# Altium PCB 继电器版本.PcbDoc
Units mil, origin at the board's own origin, x right, y up, seen from the top; angles counter-clockwise.
Board outline 8535.03 x 6310 mil, 2 copper layers (Top Layer, Bottom Layer); 9 components, 12 nets, 59 pads, 2 vias.
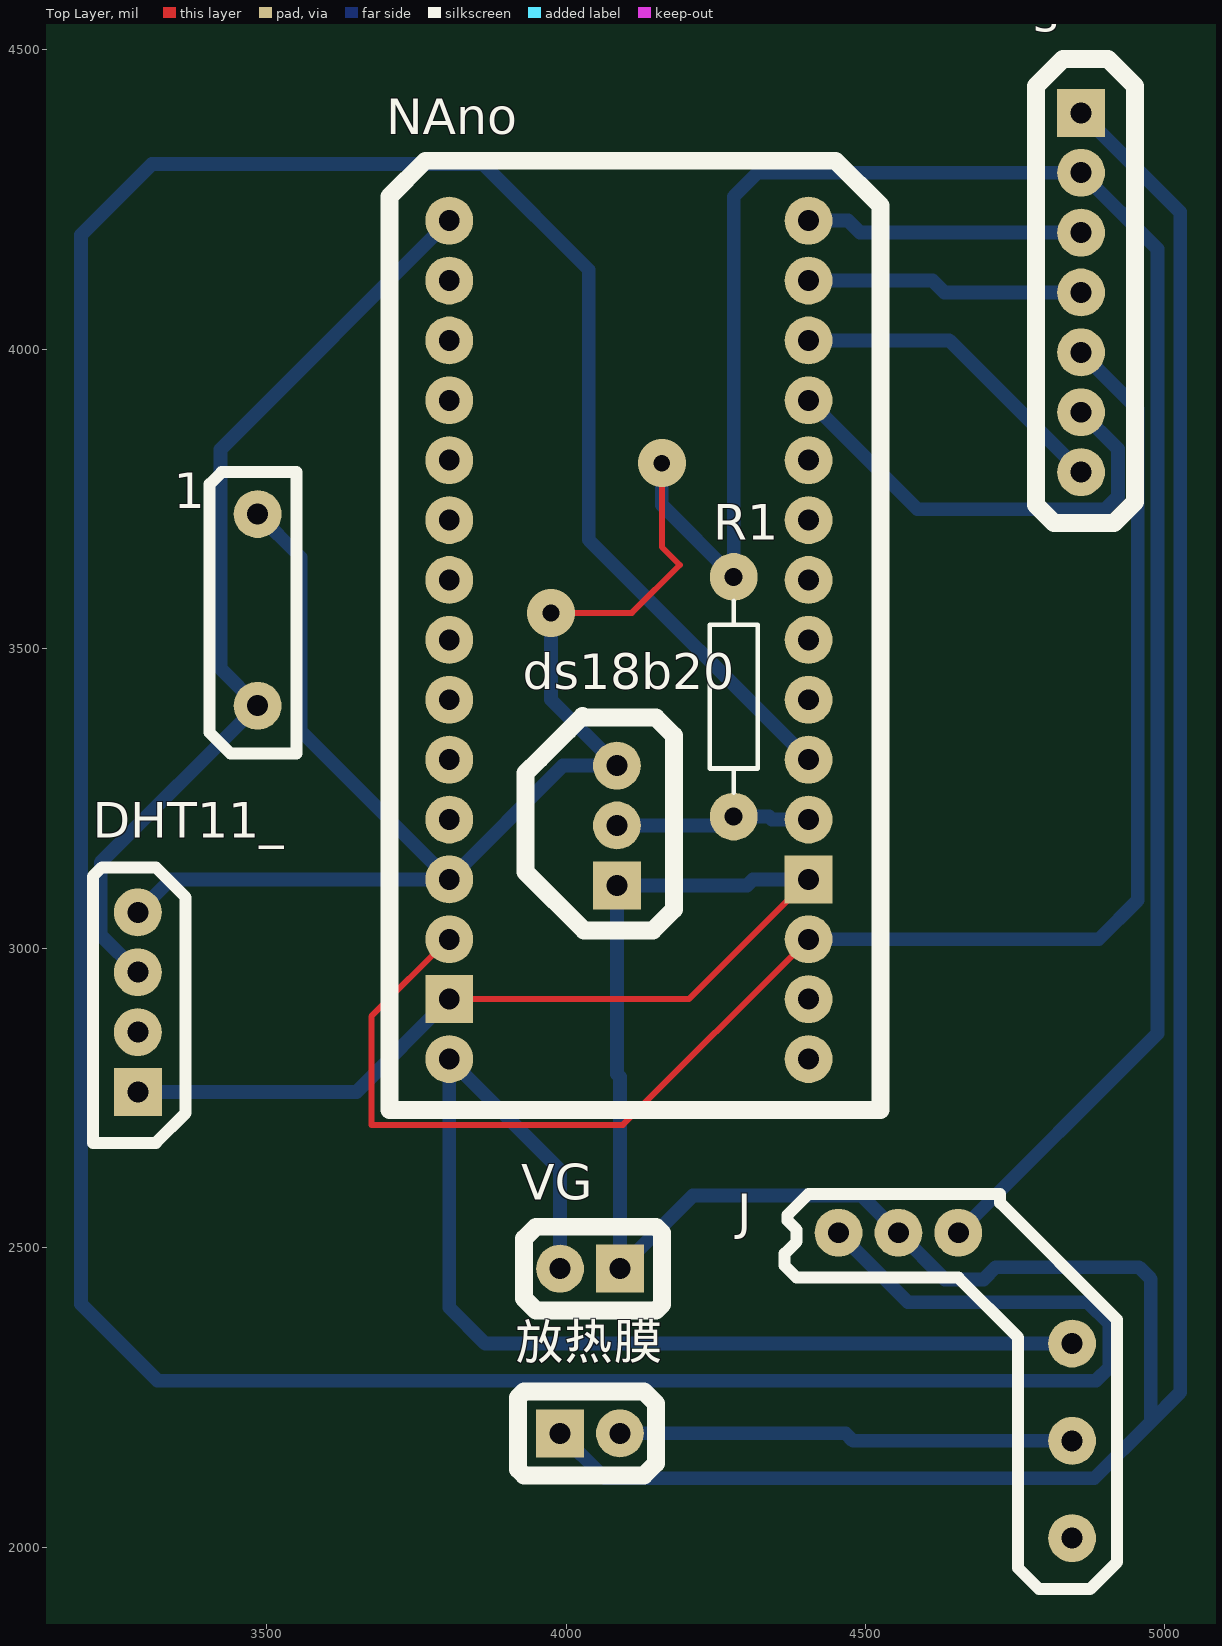
[diagram p0: Top Layer view]
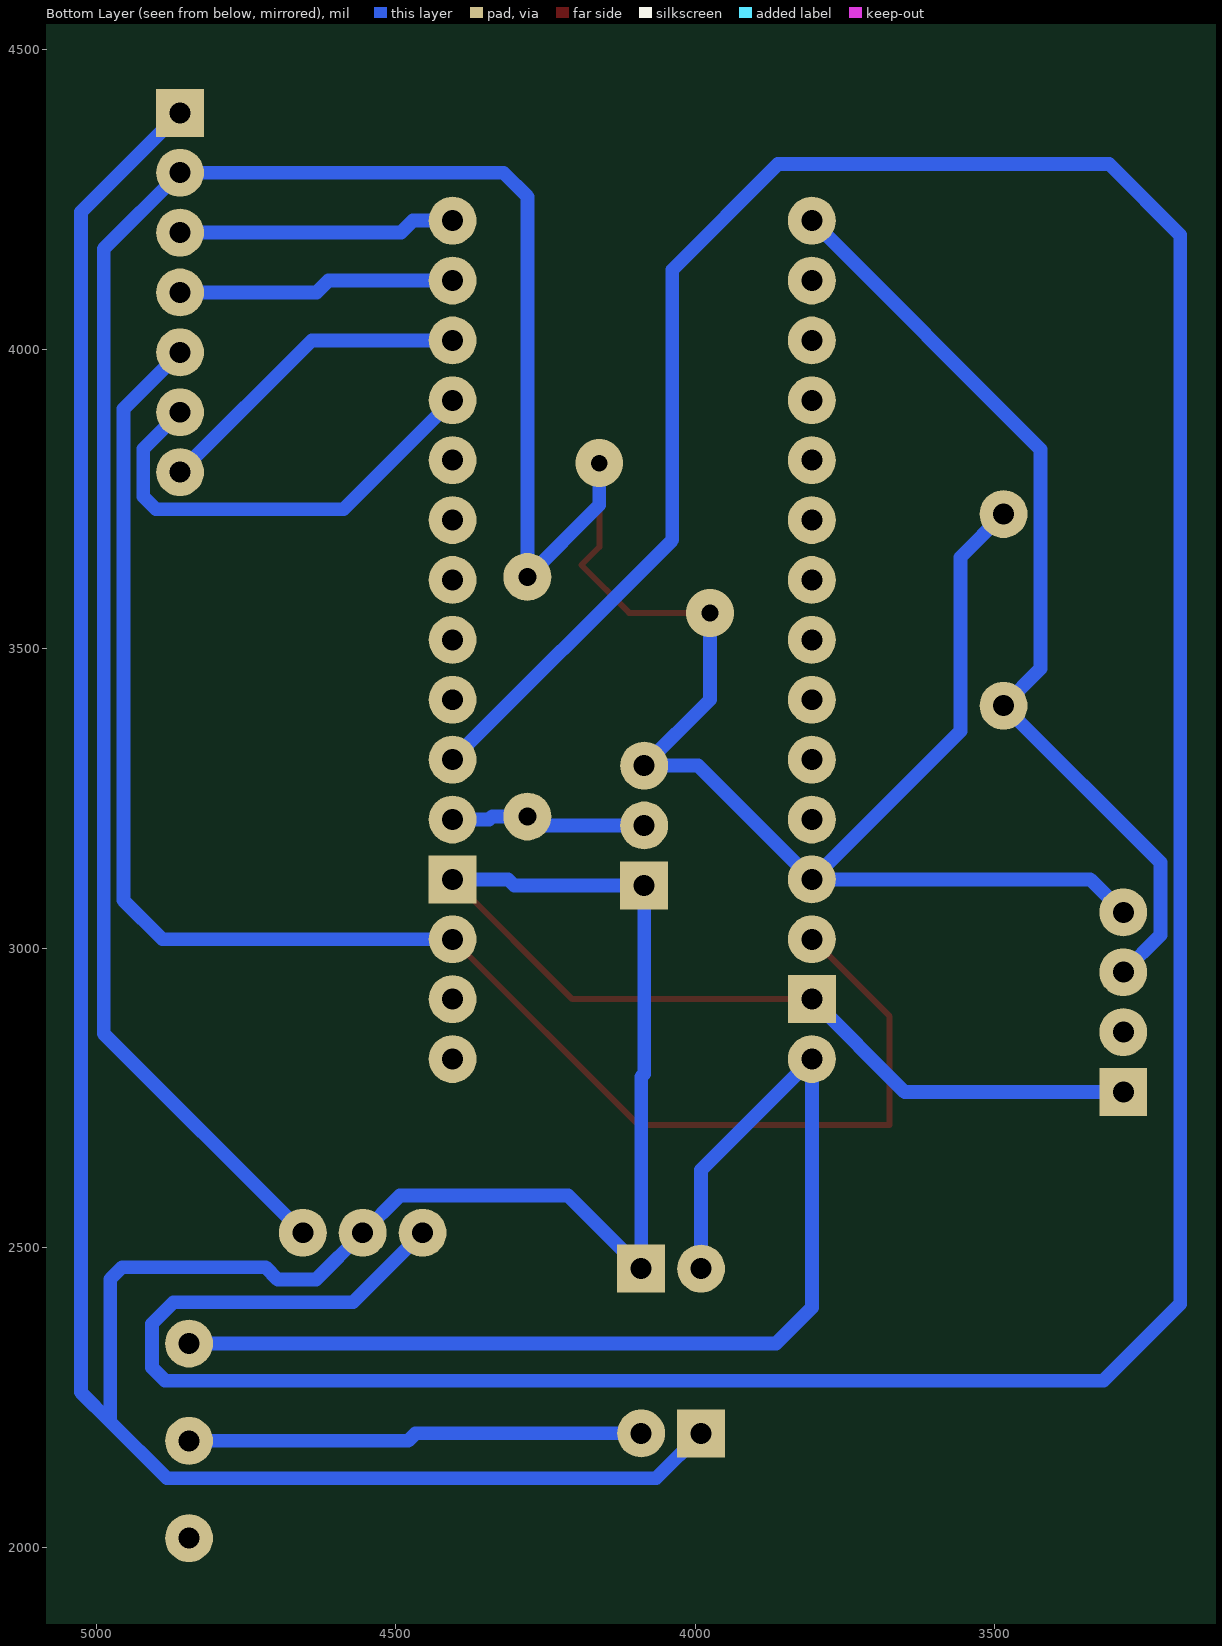
[diagram p1: Bottom Layer view, seen from below]

## Layer stack, top to bottom
Top Solder: solder mask 0.4, Solder Resist, Dk 3.5
Top Layer: signal copper 1.4
Dielectric 1: dielectric 12.6, FR-4, Dk 4.8
Bottom Layer: signal copper 1.4
Bottom Solder: solder mask 0.4, Solder Resist, Dk 3.5

## Board outline
-10.02,0 -10.02,6290 cw(c0,6290) 10.02,6290 10.02,6280.02 6940,6280.02 cw(c6940,6270) 6947.08,6277.08 8522.08,4702.08 cw(c8515,4695) 8525.01,4695 8525.01,900 cw(c8515,900) 8522.08,892.92 7622.08,-7.08 cw(c7615,0) 7615,-10.02 0,-10.02 cw(c0,0)

## Design rules (kind name [scope] priority, off if disabled: settings)
Clearance [All] p1: gap=10 ignorepadtopadclearanceinfootprint=FALSE except(0: Arc-Hole Track-Hole SMDPad-Hole THPad-Hole Via-Hole Fill-Hole Poly-Hole Region-Hole Text-Hole)
PolygonConnect [All] p1: connectstyle=Relief reliefconductorwidth=10 reliefentries=4 polygonreliefangle="90 Angle" airgapwidth=10
RoutingVias [All] p1: holewidth=28 width=50 viastyle="Through Hole" minholewidth=28 minwidth=50 maxholewidth=28 maxwidth=50
SolderMaskExpansion [All] p1: expansion=4
Width [All] p1: maxlimit=30 minlimit=10 preferedwidth=23 toplayer_maxwidth=10 toplayer_prefwidth=10 bottomlayer_minwidth=20 minimp=50.000000 maximp=50.000000 favimp=50.000000
30 further rules are at their usual default settings.

## Components (designator, comment, footprint, x,y, rotation, side; value= is the part's Value field where it differs from the comment)
1 "5k" 51ou 3485,3725 r270 top
DHT11_ "DHT11" DHT11 3285,3060 r0 top
ds18b20 "ds18b20" ds18b20 4085,3305 r0 top
J "Jidianqi" Jidianqi 4455,2525 r90 top
NAno "Nano-arduino" Nano 3805,4215 r0 top
R1 "Res2" AXIAL-0.4 4280,3420 r270 top value=10k
s "OLED，0.9" "OLED 0.9" 4860,4395 r0 top
VG "VCC-GND" VCC-gnd 3990,2465 r90 top
放热膜 "放热膜" hit-pic 4090,2190 r270 top

## Footprints (in the part's own frame and the unit in brackets; to place one, negate y for a bottom-side part, rotate by r counter-clockwise, add the part's x,y. Pads: shape width x height; smd on the part's side, far side on the other; paste and mask are expansions set on the pad)
51ou [mil]
  round 80 hole 35: 1(0,0) 2(320,0)
  silkscreen extent -70,-80 400,65
AXIAL-0.4 [mil] "Axial Device, Thru-Hole; 2 Leads; 0.4 in Pin Spacing"
  round 80 hole 30: 1(-200,0) 2(200,0)
  silkscreen extent -160,-40 160,40
DHT11 [mil]
  round 80 hole 35: DATA(0,-100) NC(0,-200) VDD(0,0)
  rect 80x80 hole 35: GND(0,-300)
  silkscreen extent -75,-385 80,75
ds18b20 [mil]
  round 80 hole 35: DQ(0,-100) VCC(0,0)
  rect 80x80 hole 35: GND(0,-200)
  silkscreen extent -152,-275 95,82
hit-pic [mil]
  rect 80x80 hole 35: GND(0,-100)
  round 80 hole 35: VCC(0,0)
  silkscreen extent -70,-170 70,60
Jidianqi [mil]
  round 80 hole 35: COM(-347.5,-390) COM(-347.5,-390) GND(0,-100) IN(0,0) NC(-510,-390) NO(-185,-390) VCC(0,-200)
  silkscreen extent -595,-465 65,90
Nano [mil]
  round 80 hole 35: 3V3(0,-100) 5V(0,-1100) A0(0,-300) A1(0,-400) A2(0,-500) A3(0,-600) A4(0,-700) A5(0,-800) A6(0,-900) A7(0,-1000) D2(600,-1000) D3(600,-900) D4(600,-800) D5(600,-700) D6(600,-600) D7(600,-500) D8(600,-400) D9(600,-300) D10(600,-200) D11(600,-100) D12(600,0) D13(0,0) REF(0,-200) RST(0,-1200) RST(600,-1200) RXD(600,-1300) TXD(600,-1400) VIN(0,-1400)
  rect 80x80 hole 35: GND(0,-1300) GND(600,-1100)
  silkscreen extent -100,-1485 720,100
"OLED 0.9" [mil]
  round 80 hole 35: CS(0,-600) D0(0,-200) D1(0,-300) DC(0,-500) RES(0,-400) VCC(0,-100)
  rect 80x80 hole 35: GND(0,0)
  silkscreen extent -75,-685 90,90
VCC-gnd [mil]
  rect 80x80 hole 35: GND(0,-100)
  round 80 hole 35: VCC(0,0)
  silkscreen extent -70,-170 70,60

## Part data
1: library part 51ou
R1: "Resistor", LatestRevisionDate=17-Jul-2002, LatestRevisionNote="Re-released for DXP Platform.", PackageDescription="Axial Device, Thru-Hole; 2 Leads; 0.4 in Pin Spacing", PackageReference=AXIAL-0.4, Published=8-Jun-2000, Publisher="Altium Limited"

## Via types
v1: diameter 80, hole 28, Top Layer to Bottom Layer, 2 vias

## Nets (pads, with @x,y where several pads share a name; then routed paths per layer and width w, separated by ;. In a path a pad name is that pad's centre, name@x,y a point inside that pad or via, vN(x,y) a via of type N, cw(c..) or ccw(c..) an arc to the next point about the centre after c; other vN are vias at no path point)
+5: 1.1 DHT11_.VDD ds18b20.VCC J.VCC NAno.5V R1.1 s.VCC | length 5807
  Top Layer w10: v1(3975,3560) 4110,3560 4190,3640 4160,3670 v1(4160,3810)
  Bottom Layer w23: DHT11_.VDD 3340,3115 NAno.5V ; 1.1 3557,3653 3557,3363 NAno.5V ; v1(3975,3560) 3975,3415 ds18b20.VCC 3995,3305 NAno.5V ; v1(4160,3810) 4160,3740 R1.1 4280,4255 4320,4295 s.VCC 4987.5,4167.5 4987.5,2857.5 J.VCC
GND: DHT11_.GND ds18b20.GND J.GND NAno.GND s.GND VG.GND 放热膜.GND | length 6814.1
  Top Layer w10: NAno.GND@3805,2915 4205,2915 NAno.GND@4405,3115
  Bottom Layer w23: DHT11_.GND 3650,2760 NAno.GND@3805,2915 ; 放热膜.GND 4065,2115 4882,2115 4976.48,2209.48 ; NAno.GND@4405,3115 4312,3115 4302,3105 ds18b20.GND 4085,2790 4090,2785 VG.GND 4212,2587 4493,2587 J.GND 4633,2447 4697,2447 4717.5,2467.5 4956.48,2467.5 4976.48,2447.5 4976.48,2209.48 ; s.GND 5025.5,4229.5 5025.5,2258.5 4976.48,2209.48
Net1_2: 1.2 DHT11_.DATA NAno.D13 | length 1573.1
  Bottom Layer w23: DHT11_.DATA 3223,3022 3223,3143 1.2 3423,3467 3423,3833 NAno.D13
Netds18b20_DQ: ds18b20.DQ NAno.D2 R1.2 | length 337.1
  Bottom Layer w23: ds18b20.DQ 4280,3205 R1.2 4338.84,3220 4343.84,3215 NAno.D2
NetJ_COM: J.COM 放热膜.VCC | length 760.2
  Bottom Layer w23: 放热膜.VCC 4467,2190 4479.5,2177.5 J.COM@4845,2177.5
NetJ_IN: J.IN NAno.D3 | length 6092.3
  Bottom Layer w23: NAno.D3 4038,3682 4038,4133 3861.5,4309.5 3308.5,4309.5 3190,4191 3190,2406 3318,2278 4885,2278 4907,2300 4907,2373 4871,2409 4571,2409 J.IN
NetNAno_D9: NAno.D9 s.DC | length 766.8
  Bottom Layer w23: NAno.D9 4587,3733 4900,3733 4921.5,3754.5 4921.5,3833.5 s.DC
NetNAno_D10: NAno.D10 s.CS | length 546.1
  Bottom Layer w23: NAno.D10 4640,4015 s.CS
NetNAno_D11: NAno.D11 s.D1 | length 463.3
  Bottom Layer w23: NAno.D11 4612,4115 4632,4095 s.D1
NetNAno_D12: NAno.D12 s.D0 | length 463.3
  Bottom Layer w23: NAno.D12 4471,4215 4491,4195 s.D0
NetNAno_RST: NAno.RST s.RES | length 2753.5
  Top Layer w10: NAno.RST@3805,3015 3803.79,3015 3675,2886.21 3675,2705 4095,2705 NAno.RST@4405,3015
  Bottom Layer w23: NAno.RST@4405,3015 4889.5,3015 4954.5,3080 4954.5,3900.5 s.RES
VCC: J.NO NAno.VIN VG.VCC | length 1906.5
  Bottom Layer w23: VG.VCC 3990,2630 NAno.VIN 3805,2400 3865,2340 J.NO
pads on no net: DHT11_.NC J.NC NAno.3V3 NAno.A0 NAno.A1 NAno.A2 NAno.A3 NAno.A4 NAno.A5 NAno.A6 NAno.A7 NAno.D4 NAno.D5 NAno.D6 NAno.D7 NAno.D8 NAno.REF NAno.RXD NAno.TXD